# EAGLE board BPW5002-microSD_1.0 (EAGLE 5.06)
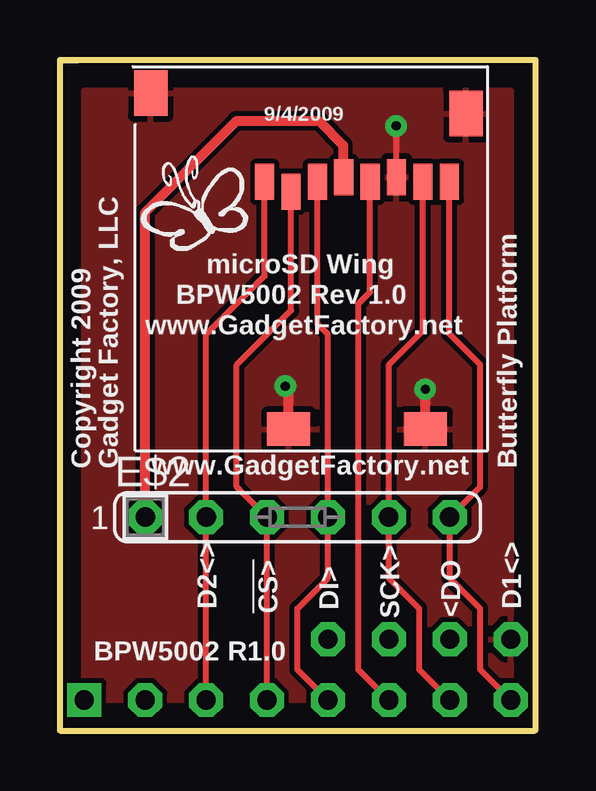
[diagram p0: board, top side]
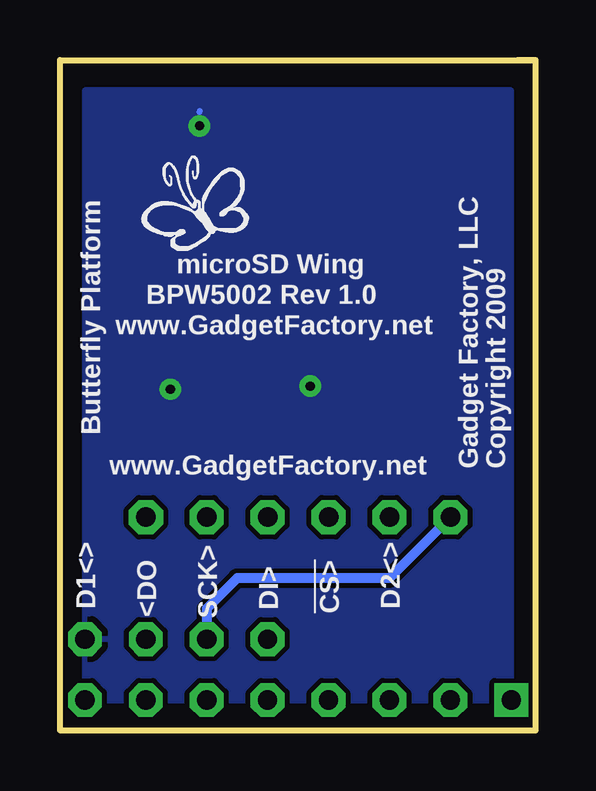
[diagram p1: board, bottom side, seen from below]

Size 19.84 x 27.94 mm. Coordinates in mm from the lower left corner, seen from the top.
Outline: 0.76,27.94 19.84,27.94 19.84,0.02 19.81,0 0,0 0,27.94 0.76,27.94
Outline: 0.76,27.94 0.08,27.94
Copper layers (1*16): Top 0.035mm / dielectric 1.5mm / Bottom 0.035mm
Design rules "SparkFun_Derived_GoldePheonix_10mil": minimum track width 10mil, minimum drill 15mil, track to track 8mil, track to pad 8mil, pad to pad 8mil, via to via 8mil, smd to smd 8mil, copper to edge 10mil, drill to drill 8mil, minimum pad ring 12mil, minimum via ring 10mil, stop-mask expansion 4mil, vias tented up to drill 18mil, thermal gap 10mil

## Footprints (pad centres in the part's own frame; a part is rotated, then mirrored left to right if it is on the bottom)
SIL6 = drill 0.813 octagon: 1 -6.35,0; 2 -3.81,0; 3 -1.27,0; 4 1.27,0; 5 3.81,0; 6 6.35,0
2908-05WB-MG = smd 0.8 x 1.5: 1 -0.1,0; 2 1,-0.4; 3 2.1,0; 4 3.2,0.2; 5 4.3,0; 6 5.4,0.2; 7 6.5,0; 8 7.6,0 | smd 1.4 x 1.9: 9 -4.85,3.7; 10 8.3,2.85 | smd 1.8 x 1.4: 11 0.9,-10.3; 12 6.6,-10.3
WING_8BIT = drill 0.8 octagon: 2V5@2 16.51,3.81; 3V3@2 13.97,3.81; 5V@2 11.43,3.81; B2 3.81,1.27; B3 6.35,1.27; B4 8.89,1.27; B5 11.43,1.27; B6 13.97,1.27; B7 16.51,1.27; B8 19.05,1.27; GND@2 19.05,3.81 | drill 0.8 square: B1 1.27,1.27

## Placement (x,y rotation side)
E$2  [SIL6]  9.91,8.89 0 top
E$3  [2908-05WB-MG]  8.64,22.86 0 top
MICROSDCARD  [WING_8BIT]  -0.25,0 0 top

## Library data of the parts
E$2 E$3 = GadgetFactory
MICROSDCARD = GadgetFactory_Pub

## Nets
3V3: E$2.1 E$3.4 MICROSDCARD.3V3@2
!CS: E$2.3 E$3.2 MICROSDCARD.B4
DAT1: E$2.6 E$3.8 MICROSDCARD.B8
DAT2: E$2.2 E$3.1 MICROSDCARD.B3
GND: E$3.6 E$3.9 E$3.10 E$3.11 E$3.12 MICROSDCARD.GND@2
MISO: E$2.5 E$3.7 MICROSDCARD.B7
MOSI: E$2.4 E$3.3 MICROSDCARD.B5
SCK: E$3.5 MICROSDCARD.B6

## Tracks (layer width: path | path; a pad name or v marks a point on that pad's centre or on a via)
3V3
  Top 0.406: E$2.1 3.56,21.59 7.37,25.4 10.8,25.4 11.81,24.38 11.81,23.09 E$3.4
  Bottom 0.406: MICROSDCARD.3V3@2 13.72,5.08 12.45,6.35 6.1,6.35 E$2.1
!CS
  Top 0.254: E$3.2 9.64,17.51 7.37,15.24 7.37,10.16 E$2.3 MICROSDCARD.B4
DAT1
  Top 0.254: E$3.8 16.24,16.53 17.53,15.24 17.53,10.16 E$2.6 16.26,6.35 17.53,5.08 17.53,2.54 MICROSDCARD.B8
DAT2
  Top 0.254: E$3.1 8.54,18.95 6.1,16.51 E$2.2 MICROSDCARD.B3
GND  (via drill 0.38)
  Top 0.254: E$3.6 14.04,25.18 v14.02,25.2
  Top 0.406: E$3.11 9.54,14.21 v9.4,14.35 | E$3.12 v15.24,14.22
  Bottom 0.254: 14.02,25.78 13.99,25.81
  pour Bottom: 1.02,1.27 1.02,26.67 18.8,26.67 18.8,1.27
  pour Top: 1.02,1.27 1.02,26.67 18.8,26.67 18.8,1.27
MISO
  Top 0.254: E$3.7 15.14,16.66 13.72,15.24 E$2.5 13.72,6.35 14.99,5.08 14.99,2.54 MICROSDCARD.B7
MOSI
  Top 0.254: E$3.3 10.74,16.95 11.18,16.51 E$2.4 11.18,6.35 9.91,5.08 9.91,2.54 MICROSDCARD.B5
SCK
  Top 0.254: E$3.5 12.94,18.27 12.45,17.78 12.45,2.54 MICROSDCARD.B6

## Text on the board
tPlace: 9/4/2009 | microSD Wing | BPW5002 Rev 1.0 | www.GadgetFactory.net | Copyright 2009 | Gadget Factory, LLC | www.GadgetFactory.net | Butterfly Platform | D2<> | SCK> | D1<> | !CS> | DI> | <DO | BPW5002 R1.0
bPlace: microSD Wing | BPW5002 Rev 1.0 | www.GadgetFactory.net | Butterfly Platform | Copyright 2009 | Gadget Factory, LLC | www.GadgetFactory.net | D2<> | SCK> | D1<> | !CS> | DI> | <DO